# Altium PCB PCB1.PcbDoc
Units mil, origin at the board's own origin, x right, y up, seen from the top; angles counter-clockwise.
Board outline 4340 x 3490 mil, 2 copper layers (Top Layer, Bottom Layer); 13 components, 20 nets, 106 pads, 2 vias.
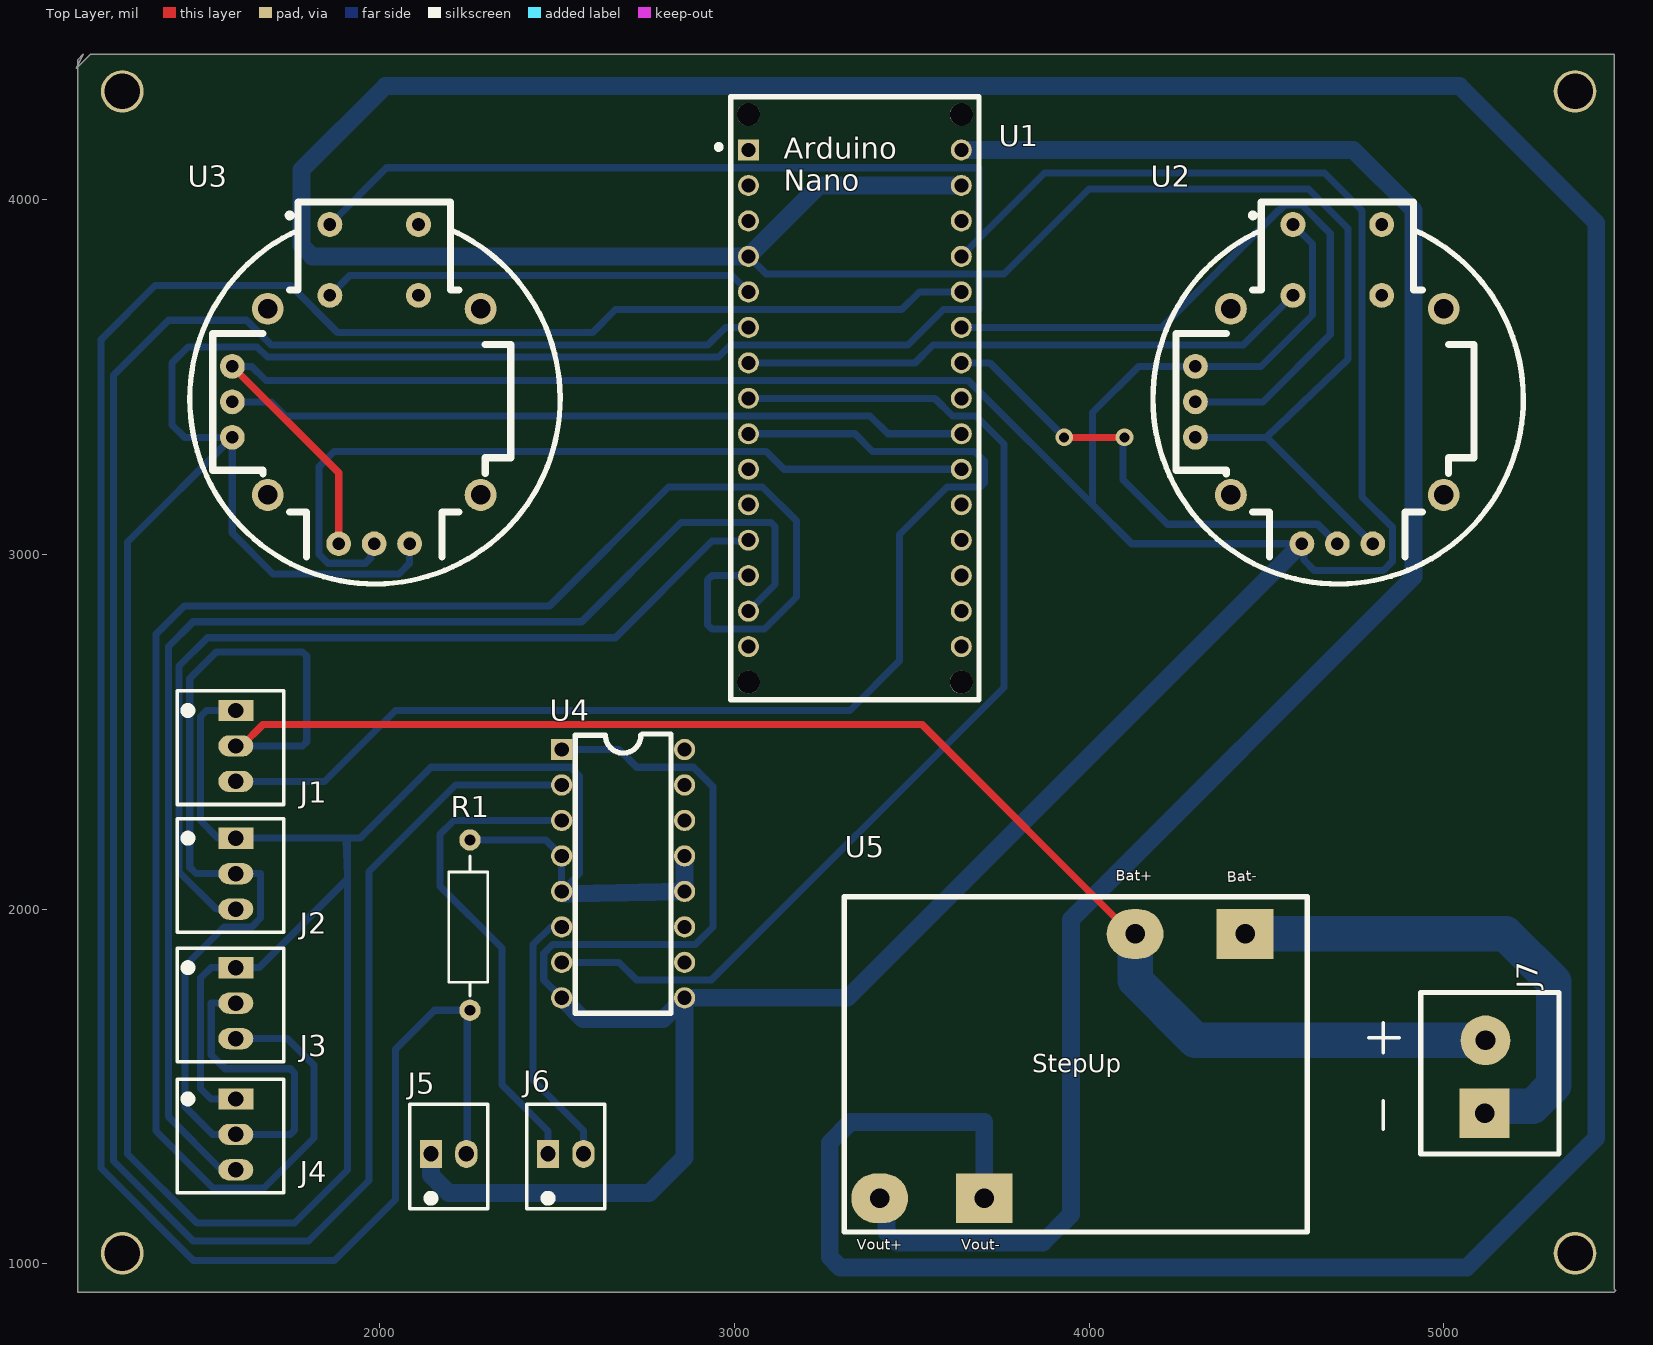
[diagram p0: Top Layer view]
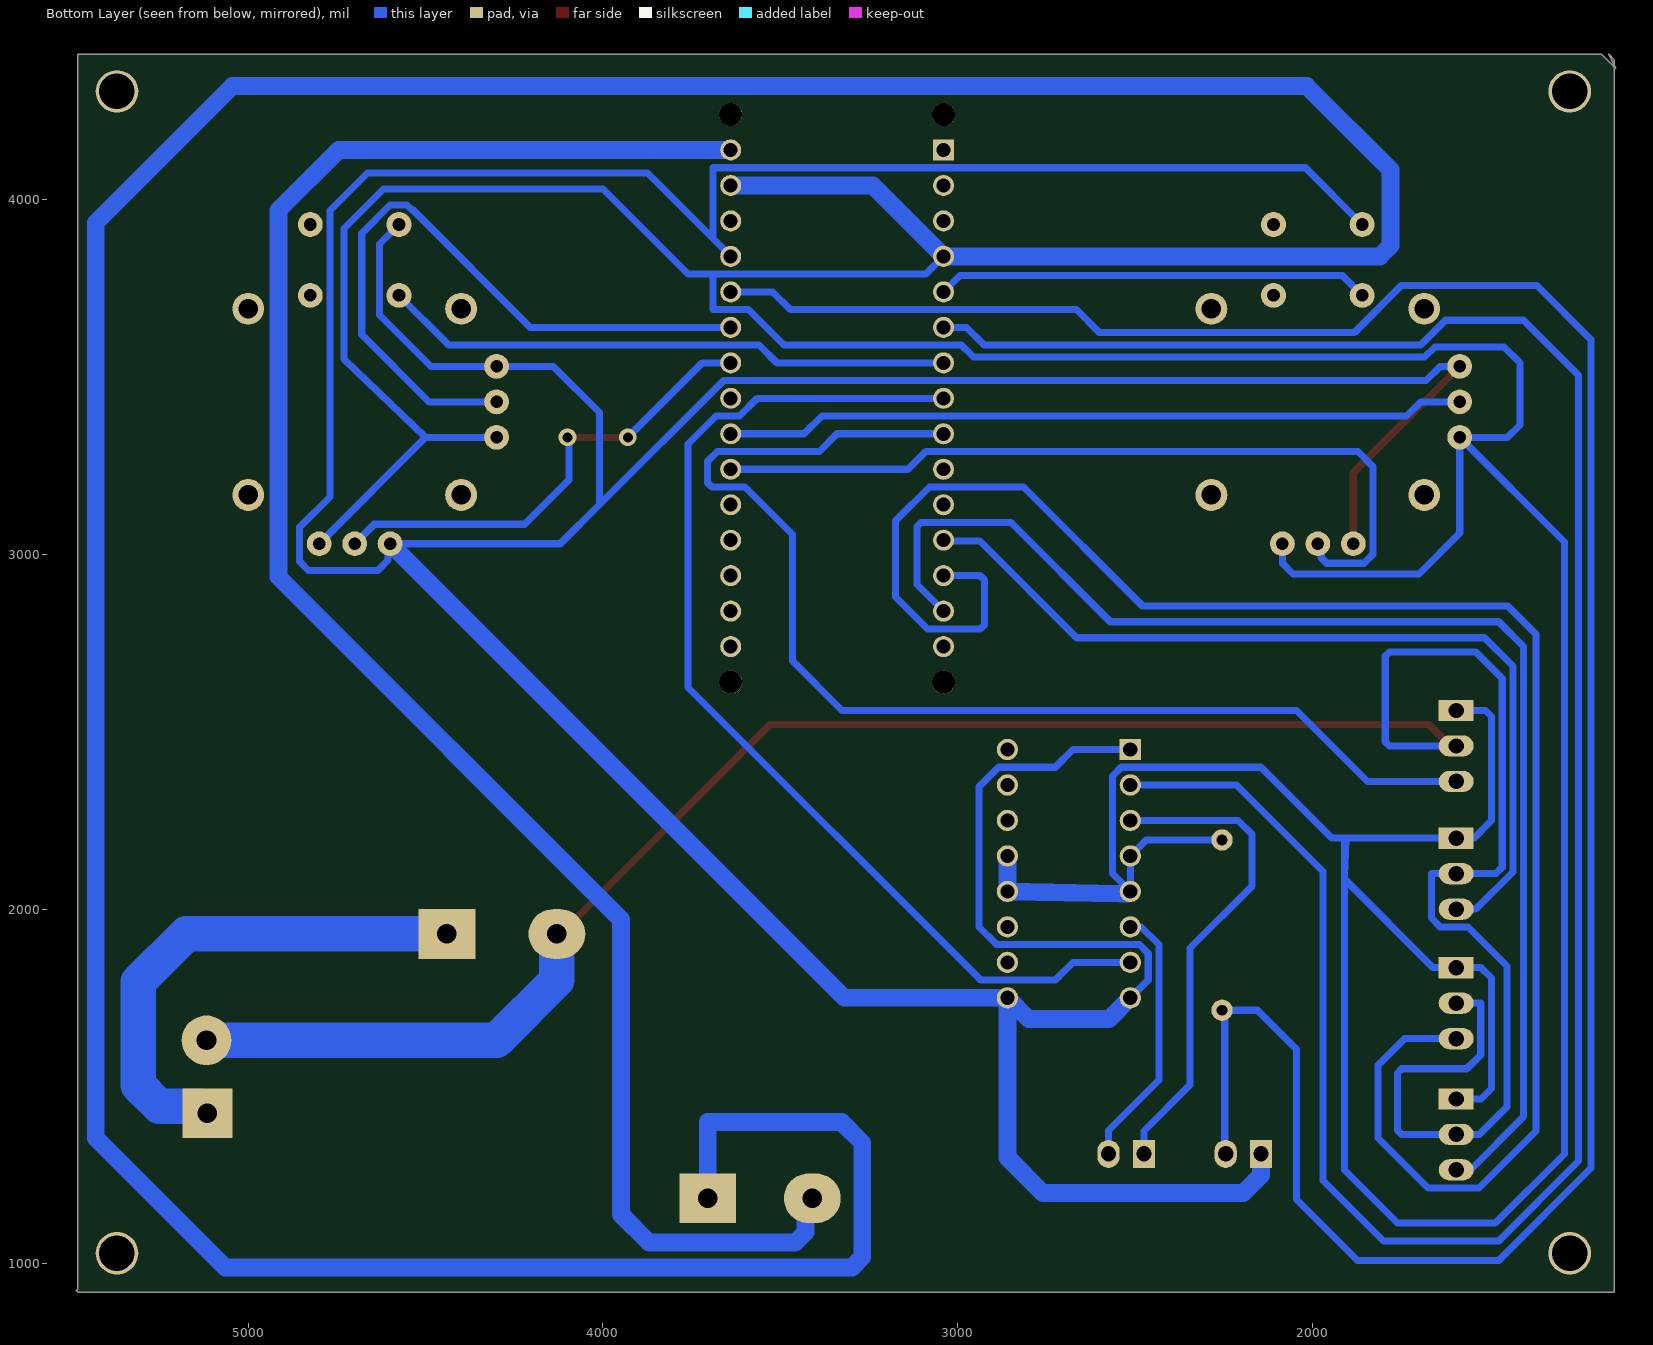
[diagram p1: Bottom Layer view, seen from below]
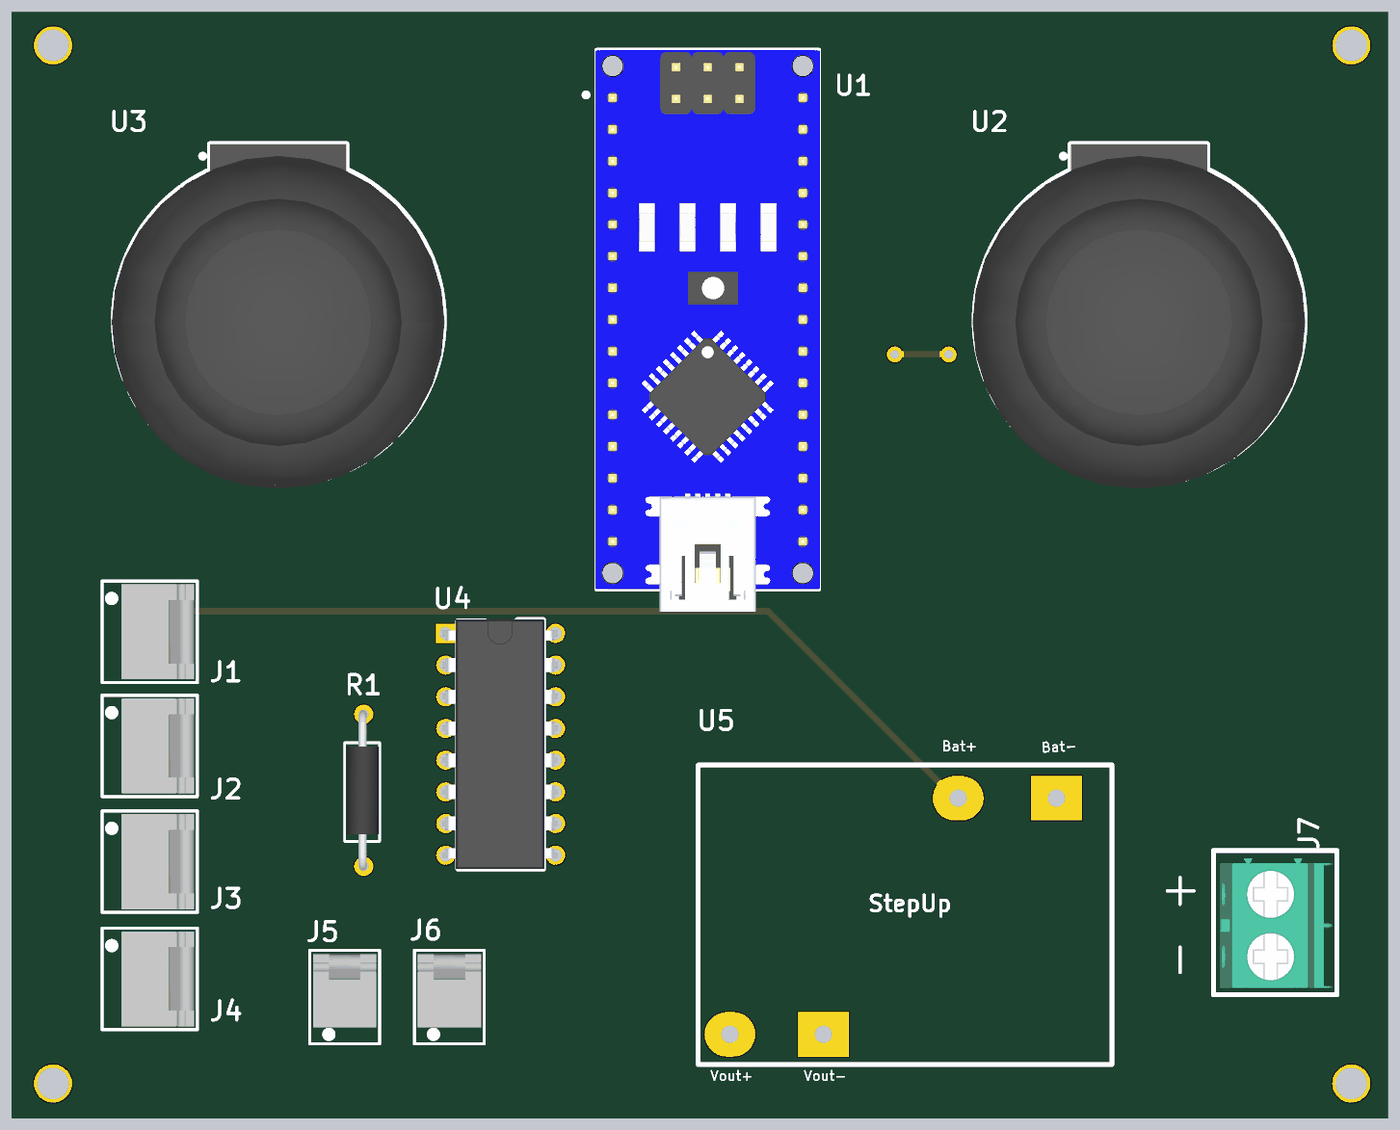
[diagram p2: 3D render of the assembled board from above, using the file's embedded part models]

## Layer stack, top to bottom
Top Solder: solder mask 0.4, Solder Resist, Dk 3.5
Top Layer: signal copper 1.4
Dielectric 1: dielectric 12.6, FR-4, Dk 4.8
Bottom Layer: signal copper 1.4
Bottom Solder: solder mask 0.4, Solder Resist, Dk 3.5

## Board outline
1145,4370 1185,4410 5480,4410 5480,930 5485,925 5480,920 1150,920 1150,4395 1165,4410

## Design rules (kind name [scope] priority, off if disabled: settings)
Clearance [All] p1: gap=5 ignorepadtopadclearanceinfootprint=FALSE
DiffPairsRouting [All] p1: maxlimit=100 minlimit=50 mostfreqgap=50 toplayer_minwidth=50 toplayer_maxwidth=50 toplayer_prefwidth=50 bottomlayer_minwidth=50 bottomlayer_maxwidth=50 bottomlayer_prefwidth=50 maxuncoupledlength=500
Height [All] p1: minheight=0 maxheight=2000 prefheight=500
HoleToHoleClearance [All] p1: gap=5 allowstackedmicrovias=TRUE
PolygonConnect [All] p1: connectstyle=Relief reliefconductorwidth=10 reliefentries=4 polygonreliefangle="90 Angle" airgapwidth=10
RoutingCorners [All] p1: cornerstyle=45-Degree minsetback=30 maxsetback=30
RoutingPriority [OnLayer('Bottom Layer')] p1: routingpriority=0
RoutingVias [All] p1: holewidth=28 width=50 viastyle="Through Hole" minholewidth=28 minwidth=50 maxholewidth=28 maxwidth=50
SilkToSolderMaskClearance [IsPad] p1: minsilkscreentomaskgap=0 clearancetoexposedcopper=TRUE
SolderMaskExpansion [All] p1: expansion=4 istentingtop=FALSE
SupplyNets "Schematic Supply Nets_2" [InNet('+5')] p1: voltage=0.000
SupplyNets "Schematic Supply Nets_1" [InNet('GND')] p2: voltage=0.000
SupplyNets "Schematic Supply Nets" [InNet('VCC')] p3: voltage=0.000
Width [All] p1: maxlimit=100 minlimit=20 preferedwidth=20 minimp=50.000000 maximp=50.000000 favimp=50.000000
24 further rules are at their usual default settings.

## Components (designator, comment, footprint, x,y, rotation, side; value= is the part's Value field where it differs from the comment)
J1 "HDR1x3" HDR1x3 1595,2560 r0 top
J2 "HDR1x3" HDR1x3 1595,2200 r0 top
J3 "HDR1x3" HDR1x3 1595,1835 r0 top
J4 "HDR1x3" HDR1x3 1595,1465 r0 top
J5 "Header 2x1" 2pin 2195,1310 r90 top
J6 "Header 2x1" 2pin 2525,1310 r90 top
J7 "VCC" TERMINALBLOCK2POS 5120,1540 r90 top
R1 "R10k" R10k 2255,1645 r90 top
U1 "ArduinoNano" ARDUINONANO 3340,3440 r0 top
U2 "Joystick" Joystick 4700,3430 r0 top
U3 "Joystick" Joystick 1985,3430 r0 top
U4 "L293D" L293D 2686.77,2100 r0 top
U5 "ModuloStepUp" StepUp 4390,1880 r180 top

## Footprints (in the part's own frame and the unit in brackets; to place one, negate y for a bottom-side part, rotate by r counter-clockwise, add the part's x,y. Pads: shape width x height; smd on the part's side, far side on the other; paste and mask are expansions set on the pad)
2pin [mm]
  rect 2x1.6 hole 1.1: 1(0,1.27)
  oval 2x1.6 hole 1.1: 2(0,-1.27)
  silkscreen extent -3.94,-2.79 3.56,2.79, body extent -2.6,-2.54 3.24,2.54, height 10.03
ARDUINONANO [mm]
  rect 1.508x1.508 hole 1: 1(-7.62,17.78)
  round 1.508 hole 1: 2(-7.62,15.24) 3(-7.62,12.7) 4(-7.62,10.16) 5(-7.62,7.62) 6(-7.62,5.08) 7(-7.62,2.54) 8(-7.62,0) 9(-7.62,-2.54) 10(-7.62,-5.08) 11(-7.62,-7.62) 12(-7.62,-10.16) 13(-7.62,-12.7) 14(-7.62,-15.24) 15(-7.62,-17.78) 16(7.62,-17.78) 17(7.62,-15.24) 18(7.62,-12.7) 19(7.62,-10.16) 20(7.62,-7.62) 21(7.62,-5.08) 22(7.62,-2.54) 23(7.62,0) 24(7.62,2.54) 25(7.62,5.08) 26(7.62,7.62) 27(7.62,10.16) 28(7.62,12.7) 29(7.62,15.24) 30(7.62,17.78)
  round 1.651 hole 1.651 unplated: ""(-7.62,-20.32) ""(-7.62,20.32) ""(7.62,-20.32) ""(7.62,20.32)
  silkscreen extent -9.85,-21.59 8.89,21.59, body extent -9,-23.4 9,21.6, height 12.6
HDR1x3 [mm]
  rect 2.5x1.524 hole 1.1: 1(0,0)
  oval 2.5x1.524 hole 1.1: 2(0,-2.54) 3(0,-5.08)
  silkscreen extent -4.19,-6.73 3.43,1.4, body extent -2.67,-6.48 3.17,1.14, height 10.03
Joystick [mil]
  round 70 hole 35.43: B1A(-125,500) B1B(125,500) B2A(-125,300) B2B(125,300)
  round 70 hole 35: H1(-100,-400) H2(0,-400) H3(100,-400) V1(-400,100) V2(-400,0) V3(-400,-100)
  round 90 hole 55: S1(-300,262.5) S2(-300,-262.5) S3(300,-262.5) S4(300,262.5)
  silkscreen extent -520,-513 524,563, body extent -525,-524 525,564, height 1190
L293D [mil]
  rect 60x60 hole 40: 1(-173.23,350)
  round 60 hole 40: 2(-173.23,250) 3(-173.23,150) 4(-173.23,50) 5(-173.23,-50) 6(-173.23,-150) 7(-173.23,-250) 8(-173.23,-350) 9(173.23,-350) 10(173.23,-250) 11(173.23,-150) 12(173.23,-50) 13(173.23,50) 14(173.23,150) 15(173.23,250) 16(173.23,350)
  silkscreen extent -135,-394 135,394, body extent -184,-394 180,394, height 201
R10k [mil]
  round 60 hole 30: 1(70,0) 2(550,0)
  silkscreen extent 110,-50 505,60, body extent 58,-48 562,55, height 103
StepUp [mil]
  rect 160x140 hole 55.12: 1(685,695) 3(-50,-50)
  oval 160x140 hole 55.12: 2(980,695) 4(260,-50)
  silkscreen extent -225,-155 1080,790
TERMINALBLOCK2POS [mil]
  rect 140x140 hole 55.12: 1(-115,5)
  round 140 hole 55.12: 2(90.28,2.32)
  silkscreen extent -230,-205 225,331, body extent -208,-190 201,164, height 449

## Part data
J1 J2 J3 J4: library part H3x1, "THT Vertical Pin Header WR-PHD, Pitch 2.54 mm, Single Row, 3 pins", Color=Black, Contact Resistance=20mR, Current Rating=3A, Manufacturer="Wurth Electronics", Manufacturer Part Number=61300311121, Max Operating Temperature=105°C, Min Operating Temperature=-40°C, Operating Supply Voltage=250V, Supplier Part Number 1=732-5316-ND, Category=Connectors, ComponentLink1Description=https://katalog.we-online.de/em/datasheet/6130xx11121.pdf?src-supplier=Digikey, ComponentLink1URL=https://katalog.we-online.de/em/datasheet/6130xx11121.pdf?src-supplier=Digikey, ComponentLink2Description=http://www.farnell.com/cad/1737268.pdf?src-supplier=Element14, ComponentLink2URL=http://www.farnell.com/cad/1737268.pdf?src-supplier=Element14, ComponentLink3Description=https://datasheet.octopart.com/61300311121-W%C3%BCrth-Elektronik-datasheet-21154836.pdf?src-supplier=Element14, ComponentLink3URL=https://datasheet.octopart.com/61300311121-W%C3%BCrth-Elektronik-datasheet-21154836.pdf?src-supplier=Element14, Contact Material=Copper, Contact Mating Length=0.236inch, Contact Plating=Gold, Contact Type="Male Pin", Gender=Male, Height=8.94mm, Lead Free="Lead Free", Mount="Through Hole", Number of Contacts=3, Number of Positions=3, Number of Rows=1, Orientation=5495OrientationType, Packaging=Bulk, Pitch=0.1inch, Pricing 1="1=0,13, 10=0,113, 25=0,094, 50=0,079, 100=0,071, 1000=0,066 (USD)", Reach SVHC Compliant=Unknown, RoHS=Yes, RoHS Compliant=Yes, Series=WR-PHD, Stock 1=144979, Supplier 1=Digikey, Termination=Solder, Voltage Rating=250V
J5 J6: library part H2x1, "No Description Available", Mfr_Name="Wurth Electronics", RefDes=RefDes, Type=Type
J7: library part Bat
R1: Supplier Part Number 1=RNF14FTD10K0CT-ND, Supplier 1=Digikey
U1: "Small, complete, and breadboard-friendly board based on the ATmega328 (Arduino Nano 3.x).", Package="Non-Standard Arduino", Availability="In Stock", Check_prices=https://www.snapeda.com/parts/A000005/Arduino/view-part/?ref=eda, MF=Arduino, MP=A000005, Price=None, Purchase-URL=https://pricing.snapeda.com/search/part/A000005/?ref=eda, SnapEDA_Link=https://www.snapeda.com/parts/A000005/Arduino/view-part/?ref=snap
U2 U3: "Thumb Joystick", Package=None, Supplier Part Number 1=1568-1526-ND, Availability=Unavailable, MP=COM-09032, Price=None, Supplier 1=Digikey
U4: "Bipolar Motor Driver - Parallel 16-PowerDIP", Package="DIP-16 STMicroelectronics", Availability="In Stock", Check_prices=https://www.snapeda.com/parts/L293D/STMicroelectronics/view-part/?ref=eda, MF=STMicroelectronics, MP=L293D, Price=None, Purchase-URL=https://pricing.snapeda.com/search/part/L293D/?ref=eda, SnapEDA_Link=https://www.snapeda.com/parts/L293D/STMicroelectronics/view-part/?ref=snap

## Free pads (board coordinates)
  round 120 hole 100: 1(1275,1030) 1(1275,4305) 1(5370,1030) 1(5370,4305)

## Via types
v1: diameter 50, hole 28, Top Layer to Bottom Layer, 2 vias

## Nets (pads, with @x,y where several pads share a name; then routed paths per layer and width w, separated by ;. In a path a pad name is that pad's centre, name@x,y a point inside that pad or via, vN(x,y) a via of type N, cw(c..) or ccw(c..) an arc to the next point about the centre after c; other vN are vias at no path point)
+5: J5.1 U1.27 U2.B1A U2.H1 U2.V1 U3.B1A U3.H1 U3.V1 U4.1 U4.8 U4.9 | length 15301.8
  Top Layer w20: U3.V1 1885,3230 U3.H1
  Bottom Layer w20: U3.V1 1640,3530 1680,3490 3637.24,3490 3637.55,3489.69 3660.58,3489.69 4010,3140.27 ; U3.B1A 2020,4090 3690,4090 3690,3890 ; U4.8 2463,1800.54 2463,1875 2488,1900 2890,1900 2940,1950 2940,2345 2885,2400 2725,2400 2675,2450 U4.1 ; U1.27 3690,3890 ; U2.B1A 4630,3875 4630,3675 4485,3530 U2.V1 4140,3530 4010,3400 4010,3140.27 ; 3690,3890 3875,4075 4664,4075 4770,3969 4770,3162 4855,3077 4855,2980 4830,2955 4635,2955 4605.96,2984.04 4605.96,3024.04 U2.H1 4120.27,3030 4010,3140.27
  Bottom Layer w50: J5.1 2145,1250 2195,1200 2760,1200 2860,1300 U4.9 ; U4.8 2573.54,1690 2800,1690 U4.9 ; U2.H1 3320,1750 U4.9
GND: J1.1 J2.1 J3.1 J4.1 R1.2 U1.4 U1.29 U2.H3 U2.V3 U3.H3 U3.V3 U4.4 U4.5 U4.12 U4.13 U5.1 | length 26486.2
  Bottom Layer w20: J4.1 1525,1465 1495.79,1494.21 1495.79,1805.79 1525,1835 J3.1 1660,1835 1909.25,2084.25 1909.25,2092.95 1905,2195 1910,2190 1910,2084.25 1910,1265 1760,1115 1485,1115 1290,1310 1290,3035 U3.V3 ; J1.1 1512,2560 1495,2543 1495,2250 1545,2200 1945,2200 2145,2400 2539,2400 2564,2375 2564,2100.46 U4.5 U4.4 2468.54,2195 R1.2 ; U3.H3 2085,2975 2055,2945 1700,2945 1585,3060 U3.V3 ; U1.4 3090,3790 3690,3790 ; U2.V3 4500,3330 ; U2.H3 4500,3330 ; U3.V3 1450,3330 1415,3365 1415,3540 1460,3585 1655,3585 1684,3556 2956,3556 2990,3590 3490,3590 3590,3690 3690,3690 3690,3790 ; 3690,3790 3760,3790 4000,4030 4618.64,4030 4730,3918.64 4730,3550.32 4500,3330
  Bottom Layer w50: U4.5 2520.47,2043.36 2538.45,2043.35 2538.96,2043.36 U4.12 U4.13 ; U1.29 3240,4040 U1.4 1810,3840 1780,3870 1780,4084 2016,4320 5045,4320 5430,3935 5430,1355 5065,990 3298.29,990 3269,1019.29 3269,1341.42 3327.58,1400 3705,1400 U5.1@3705,1205
NetJ1_3: J1.3 U1.9 | length 3425.1
  Bottom Layer w20: J1.3 1845,2360 2045,2560 3326,2560 3466,2700 3466,3056 3600,3190 3693.28,3190 3705,3201.72 3705,3262.5 3677.5,3290 3390,3290 3340,3340 U1.9
NetJ2_3: J2.3 U1.12 | length 2535.5
  Bottom Layer w20: J2.3 1540,2000 1435,2105 1435,2685 1515,2765 2665,2765 2937.74,3037.74 3037.74,3037.74 U1.12
NetJ3_3: J3.3 U1.13 | length 5197.9
  Bottom Layer w20: J3.3 J3.3@1607.61,1635 ; J3.3@1607.61,1633.07 J3.3@1607.61,1635 ; U1.13 2936.72,2940 2925,2928.28 2925,2801.72 2936.72,2790 3085,2790 3175,2880 3175,3095 3080,3190 2815,3190 2480,2855 1450,2855 1370,2775 1370,1375 1531,1214 1674,1214 1815,1355 1815,1560 1740,1635 J3.3@1607.61,1635
NetJ4_3: J4.3 U1.14 | length 3706.3
  Bottom Layer w20: J4.3 1555,1265 1405,1415 1405,2740 1475,2810 2570,2810 2850,3090 3103.28,3090 3115,3078.28 3115,2915 U1.14
NetJ5_2: J5.2 R1.1 U1.26 | length 7024.6
  Bottom Layer w20: J5.2 2247.35,1312.35 2247.35,1702.65 2245,1705 R1.1 2245,1715 2155,1715 2045,1605 2045,1181.5 1873.5,1010 1475,1010 1215,1270 1215,3605 1367.5,3757.5 1750,3757.5 1882.5,3625 2600,3625 2665,3690 3472,3690 3522,3740 U1.26
NetJ6_1: J6.1 U4.3 | length 1386.4
  Bottom Layer w20: J6.1 2475,1375 2345,1505 2345,1890 2170,2065 2170,2210 2210,2250 U4.3
NetJ6_2: J6.2 U4.6 | length 750.1
  Bottom Layer w20: U4.6 2483,1950 2433,1900 2433,1518 2575,1376 J6.2
NetJ7_1: J7.1 U5.3 | length 1444.9
  Bottom Layer w100: U5.3 5175,1930 5310,1795 5310,1503.58 5251.42,1445 5135,1445 J7.1
NetU1_5: U1.5 U3.B2A | length 1222.2
  Bottom Layer w20: U3.B2A 1916,3786 2994,3786 U1.5
NetU1_6: U1.6 U4.2 | length 6518.1
  Bottom Layer w20: U4.2 2214,2350 1970,2106 1970,1235 1800,1065 1475,1065 1250,1290 1250,3505 1405,3660 1625,3660 1695,3590 2925.31,3590 2975.31,3640 U1.6
NetU1_7: U1.7 U2.B2A | length 1613.7
  Bottom Layer w20: U1.7 3510,3540 3560,3590 4435,3590 U2.B2A
NetU1_8: U1.8 U4.7 | length 3068.5
  Bottom Layer w20: U4.7 2675,1850 2725,1800 2935.35,1800 3760,2624.65 3760,3311 3681,3390 3615,3390 3565,3440 U1.8
NetU1_21: U1.21 U3.H2 | length 2301.8
  Bottom Layer w20: U3.H2 1975.43,3020.43 1975.43,2990.43 1960,2975 1855,2975 1830,3000 1830,3248 1872,3290 3090,3290 3140,3240 U1.21
NetU1_22: U1.22 U3.V2 | length 2092.3
  Bottom Layer w20: U3.V2 1695,3430 1735,3390 3383,3390 3433,3340 U1.22
NetU1_24: U1.24 U2.H2 | length 1346.7
  Top Layer w20: v1(3930,3330) v1(4100,3330)
  Bottom Layer w20: U1.24 3720,3540 v1(3930,3330) ; v1(4100,3330) 4096.36,3326.36 4096.36,3210 4221.36,3085 4645,3085 U2.H2
NetU1_25: U1.25 U2.V2 | length 1959.7
  Bottom Layer w20: U1.25 4205,3640 4535,3970 4537.22,3970 4552.22,3985 4600,3985 4680,3905 4680,3620 4490,3430 U2.V2
NetU1_30: U1.30 U5.2 | length 5244.8
  Bottom Layer w50: U5.2 3429.35,1165.65 3429.35,1089.29 3458.64,1060 3870,1060 3949,1139 3949,1971 4915,2937 4915,3970 4745,4140 U1.30
VCC: J1.2 J2.2 J3.2 J4.2 J7.2 U5.4 | length 7332
  Top Layer w20: J1.2 1610.93,2460 1670.93,2520 3530,2520 4120,1930 U5.4
  Bottom Layer w20: J3.2 1525.79,1735 1525.79,1589.21 1565,1550 1748.28,1550 1760,1538.28 1760,1376.72 1748.28,1365 1530,1365 1452,1443 1452,1840 1562,1950 1640,1950 1665,1975 1665,2100 1483,2100 1465,2118 1465,2650 1540,2725 1783.28,2725 1795,2713.28 1795,2471.72 1783.28,2460 J1.2
  Bottom Layer w100: U5.4@4130,1950 U5.4 4130,1800 4299.72,1630.28 J7.2
pads on no net: U1. U1.1 U1.2 U1.3 U1.10 U1.11 U1.15 U1.16 U1.17 U1.18 U1.19 U1.20 U1.23 U1.28 U2.B1B U2.B2B U2.S1 U2.S2 U2.S3 U2.S4 U3.B1B U3.B2B U3.S1 U3.S2 U3.S3 U3.S4 U4.10 U4.11 U4.14 U4.15 U4.16

## Text inside footprints (layer, text, board x,y; h text height)
U1: Top Overlay "Arduino / Nano" at 3140,4025 h60
U5: Top Overlay "StepUp" at 3840,1540 h50; Top Overlay "Vout-" at 3640,1040 h30; Top Overlay "Vout+" at 3345,1040 h30; Top Overlay "Bat-" at 4389.74,2075.24 h30 r2.86; Top Overlay "Bat+" at 4075,2080 h30